# Altium PCB 气压.pcbdoc
Units mil, origin at the board's own origin, x right, y up, seen from the top; angles counter-clockwise.
Board outline 2895 x 2875 mil, 2 copper layers (Top Layer, Bottom Layer); 21 components, 13 nets, 110 pads, 14 vias.
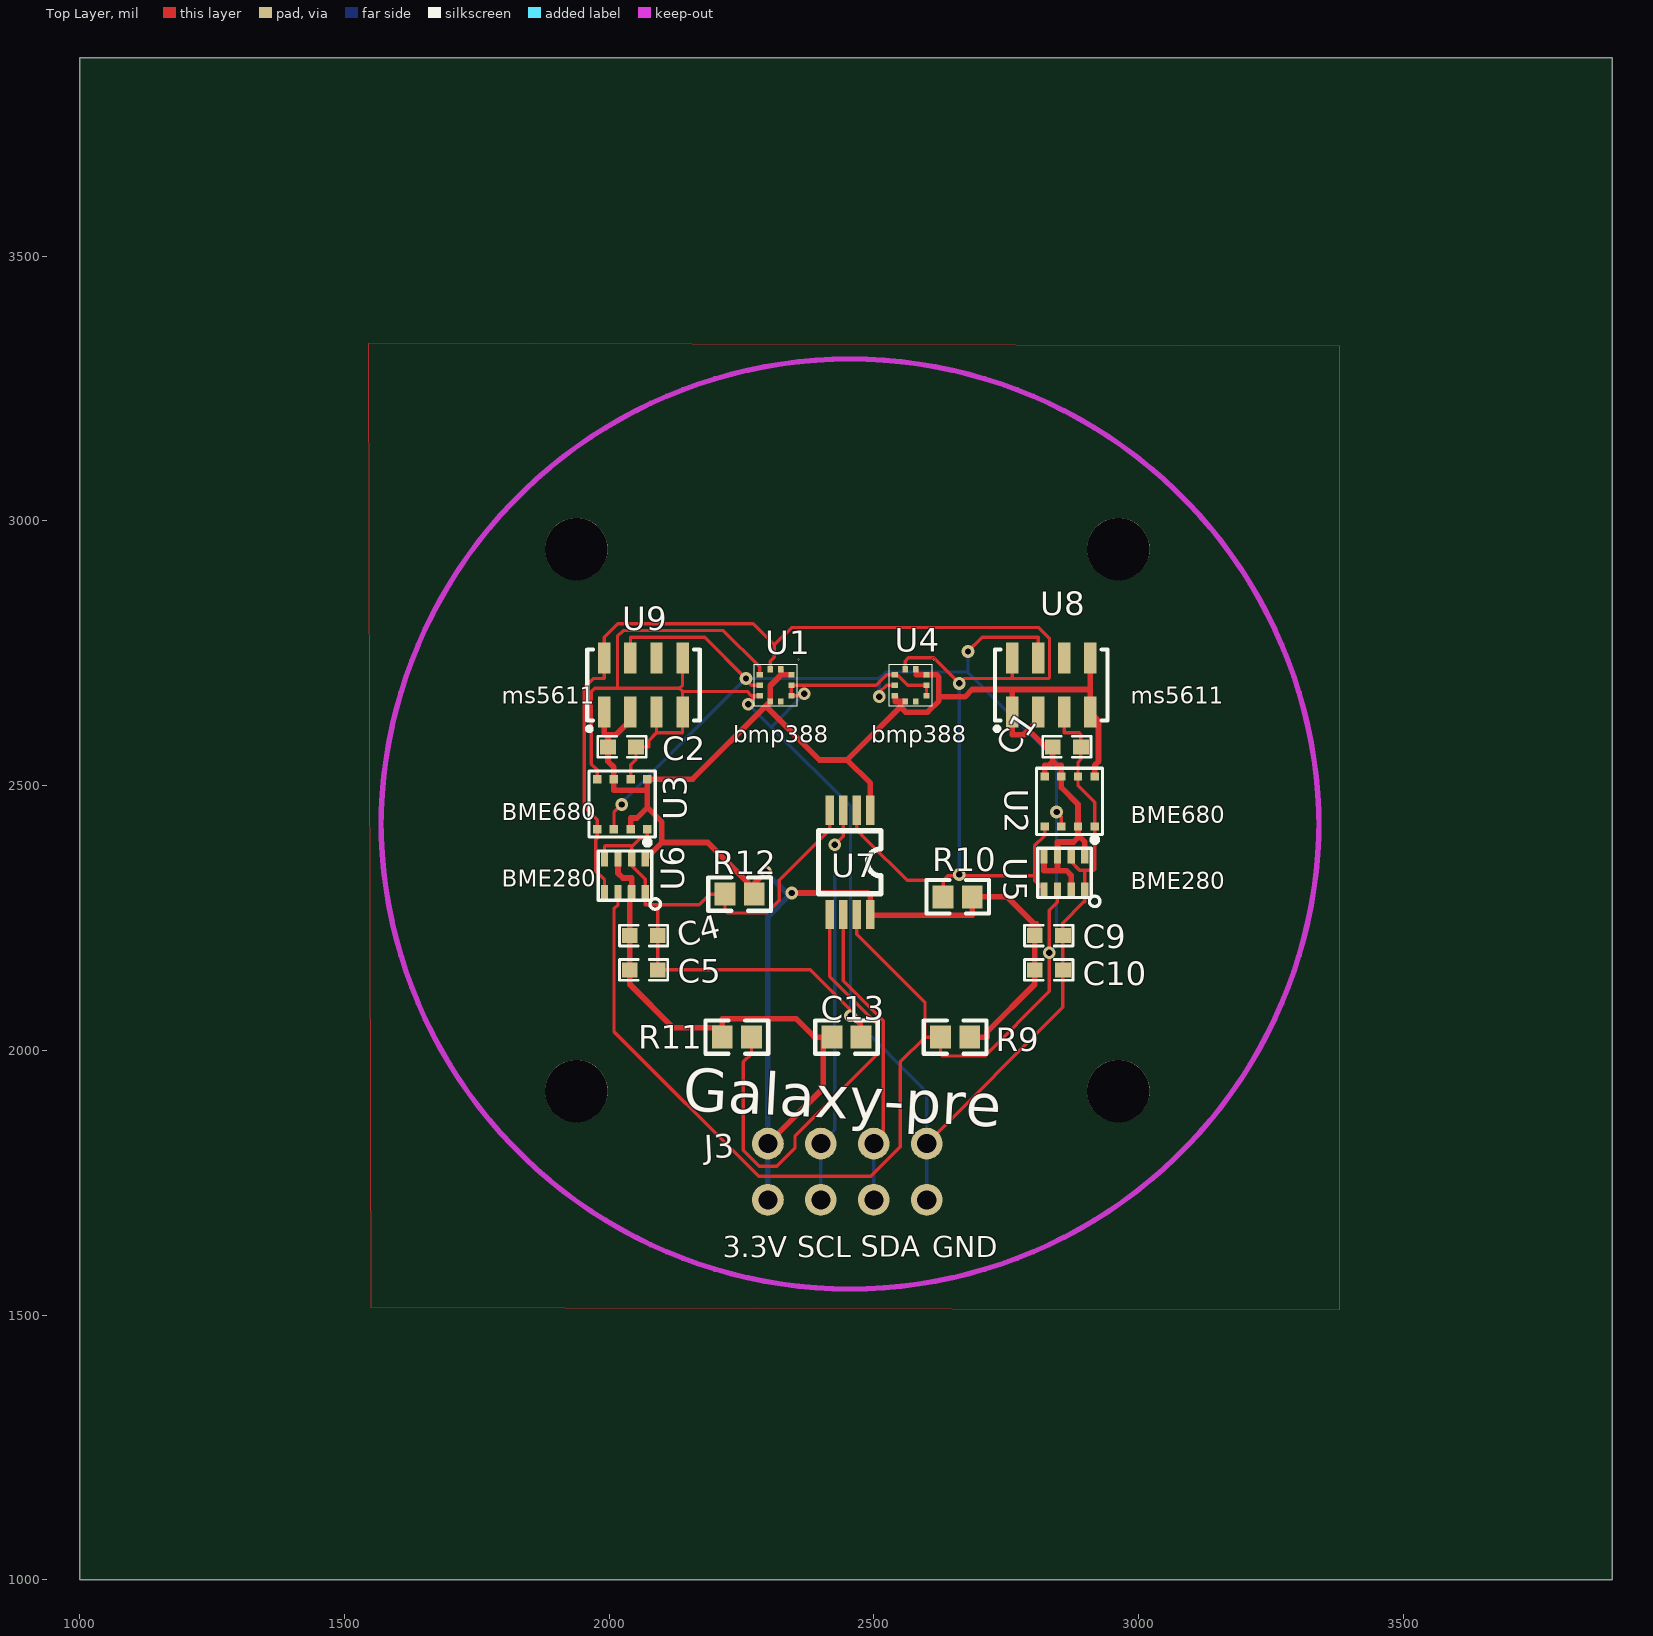
[diagram p0: Top Layer view]
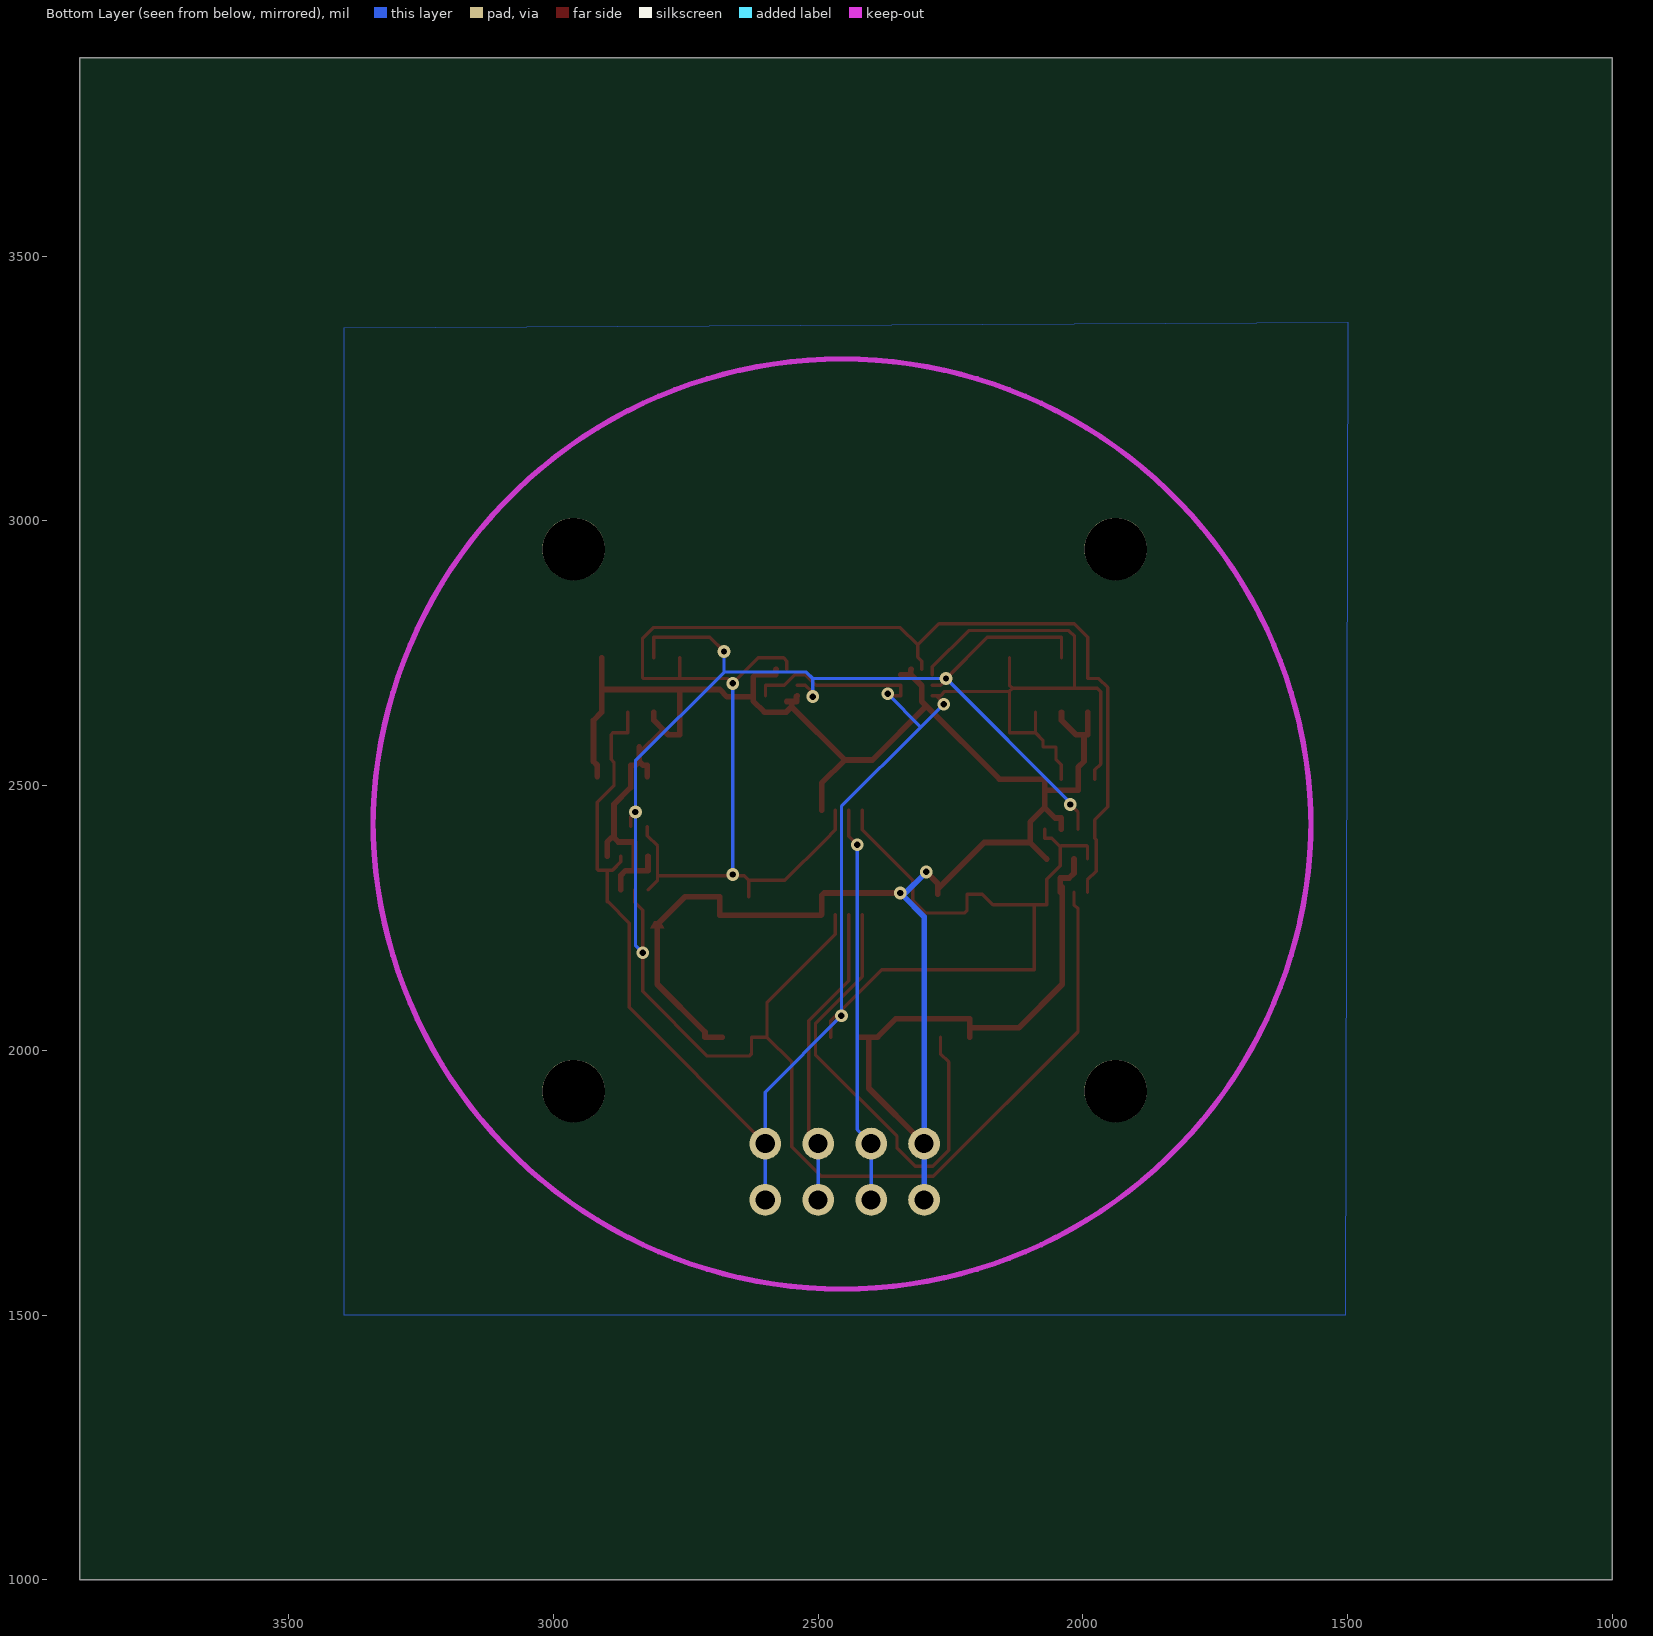
[diagram p1: Bottom Layer view, seen from below]

## Layer stack, top to bottom
Top Layer: signal copper (thickness not stored)
Dielectric: dielectric 12.6, FR-4, Dk 4.8
Bottom Layer: signal copper (thickness not stored)

## Board outline
3895,1000 1000,1000 1000,3875 3895,3875

## Components (designator, comment, footprint, x,y, rotation, side; value= is the part's Value field where it differs from the comment)
C1 "0.1uf" N0603 2885,2570 r0 top
C2 "0.1uf" N0603 2045,2570 r0 top
C4 "0.1uf" N0603 2045,2220 r180 top
C5 "0.1uf" N0603 2045,2155 r180 top
C9 "0.1uf" N0603 2810,2220 r180 top
C10 "0.1uf" N0603 2810,2155 r180 top
C13 "CAP-0603" 0603 2480,2025 r180 top
J3 "排针" PIN_4*2.54 2300,1840 r90 top
R9 "10K" 0603 2685,2025 r180 top
R10 "10K" 0603 2690,2290 r180 top
R11 "10K" 0603 2210,2025 r0 top
R12 "100K" 0603 2215,2295 r0 top
U1 "BMP388" NEWPCBLIB 2275,2650 r0 top
U2 "BME680" LGA-8-3X3MM 2870,2470 r270 top
U3 "BME680" LGA-8-3X3MM 2025,2465 r270 top
U4 "BMP388" NEWPCBLIB 2530,2650 r0 top
U5 "BME280/bmp280" LGA-8 2860,2335 r270 top
U6 "BME280" LGA-8 2030,2330 r270 top
U7 "LTC4307CMS8#PBF" MSOP-8 2455,2355 r270 top
U8 "MS5611-01BA03" QFN-8_5X3MM 2835,2690 r90 top
U9 "MS5611-01BA03" QFN-8_5X3MM 2065,2690 r90 top

## Footprints (in the part's own frame and the unit in brackets; to place one, negate y for a bottom-side part, rotate by r counter-clockwise, add the part's x,y. Pads: shape width x height; smd on the part's side, far side on the other; paste and mask are expansions set on the pad)
0603 [mil]
  rect 39.3x43.4 smd: 1(3.95,0) 2(59.05,0)
  silkscreen extent -28,-32 91,32
LGA-8 [mil]
  rect 27.6x13.8 smd: 1(31.5,38.6) 2(31.5,13) 3(31.5,-13) 4(31.5,-38.6) 5(-31.5,-38.6) 6(-31.5,-13) 7(-31.5,13) 8(-31.5,38.6)
  silkscreen extent -46,-50 63,67
LGA-8-3X3MM [mil]
  rect 15.8x15.8 smd: 1(47.2,47.2) 2(47.2,15.7) 3(47.2,-15.8) 4(47.2,-47.3) 5(-47.3,-47.3) 6(-47.3,-15.8) 7(-47.3,15.7) 8(-47.3,47.2)
  silkscreen extent -63,-63 77,62
MSOP-8 [mil]
  rect 55x16 smd: 1(-98.5,38.5) 2(-98.5,12.5) 3(-98.5,-12.5) 4(-98.5,-38.5) 5(98.5,-38.5) 6(98.5,-12.5) 7(98.5,12.5) 8(98.5,38.5)
  silkscreen extent -60,-60 60,59
N0603 [mil]
  rect 30x28 smd: 1(6,3) 2(-47,3)
  silkscreen extent -66,-16 25,23
NEWPCBLIB [mil]
  rect 10.8x11.8 smd: 1(49.2,69.9) 2(29.5,69.9) 6(29.5,8.9)
  rect 11.8x10.9 smd: 3(9.4,59.45) 4(9.4,39.75) 9(69.4,39.75) 10(69.4,59.45)
  rect 11.8x10.8 smd: 5(9.4,19.7) 8(69.4,19.7)
  rect 10.8x11.9 smd: 7(49.2,8.85)
  silkscreen extent 0,0 79,79
PIN_4*2.54 [mil]
  round 60 hole 36: 1(-16.02,0) 2(-16.02,-100) 3(-16.02,-200) 4(-16.02,-300)
QFN-8_5X3MM [mil]
  rect 59x23.6 smd: 1(-51.2,73.8) 2(-51.2,24.6) 3(-51.2,-24.6) 4(-51.2,-73.8) 5(51.2,-73.8) 6(51.2,-24.6) 7(51.2,24.6) 8(51.2,73.8)
  silkscreen extent -86,-106 67,106

## Free pads (board coordinates)
  round 60 hole 36: 1(2300,1717.6) 2(2400,1717.6) 3(2500,1717.6) 4(2600,1717.6)
  round 118.11 hole 118.11 unplated: ""(1938.19,1923.19) ""(1938.19,2946.81) ""(2961.81,1923.19) ""(2961.81,2946.81)

## Via types
v1: diameter 24.02, hole 12.2, Top Layer to Bottom Layer, 14 vias

## Nets (pads, with @x,y where several pads share a name; then routed paths per layer and width w, separated by ;. In a path a pad name is that pad's centre, name@x,y a point inside that pad or via, vN(x,y) a via of type N, cw(c..) or ccw(c..) an arc to the next point about the centre after c; other vN are vias at no path point)
3.3V: C1.2 C2.2 C4.1 C5.1 C9.1 C10.1 C13.2 J3.1 pad.1 R9.1 R10.1 R11.1 R12.2 U1.1 U1.6 U1.10 U2.2 U2.5 U2.6 U2.8 U3.2 U3.6 U3.8 U4.1 U4.5 U4.6 U4.10 U5.2 U5.5 U5.6 U5.8 U6.2 U6.6 U6.8 U7.1 U7.8 U8.1 U8.2 U8.4 U8.5 U9.1 U9.2 | length 5571.6
  Top Layer w10.63: U9.1 1991.2,2596.1 1998,2596.1 ; U6.6 2017,2334.5 2026,2325.5 2043,2325.5 U6.2@2043,2312 ; U9.2 2040.4,2623.4 2013.1,2596.1 1998,2596.1 ; U3.2 2040.7,2438.9 2052.5,2438.9 2072.3,2458.6 ; U6.2 U6.2@2043,2312 ; U6.8 2099.7,2392.6 ; R11.1 R11.1@2214,2042.4 ; R12.2@2274.1,2295 R12.2@2274.1,2297.2 ; v1(2295.8,2336.9) 2274.1,2315.2 R12.2@2274.1,2297.2 ; J3.1 2404.5,1928.5 C13.2@2404.5,2025 ; U1.1 2325.3,2718.8 2325.3,2709.4 ; U1.10 2325.3,2709.4 ; v1(2344.8,2297.2) 2488.9,2297.2 2493.5,2292.6 U7.8 2494.9,2255.1 2686.1,2255.1 2686.1,2290 2751.6,2290 2804,2237.6 C9.1 C10.1 2804,2138.4 2804,2124.8 2713.9,2034.7 2713.9,2025 R9.1@2681.1,2025 ; C13.2 C13.2@2404.5,2025 ; U7.1 2493.5,2494.2 2493.5,2504.6 2449.7,2548.4 ; U4.5 2540.9,2668.2 2540.9,2658.9 2550.2,2658.9 ; U4.6 2550.2,2658.9 ; U4.1 2580.3,2718.8 2580.3,2709.4 2589.9,2709.4 U4.10 2618.5,2709.4 2622.8,2705.1 2622.8,2667.7 ; U8.2 2810.4,2623.4 2792.2,2605.2 ; U5.5 2821.4,2339.5 2847,2339.5 ; U2.5 2822.7,2538.4 2830.6,2538.4 2838,2545.8 ; C1.2 C1.2@2838,2559.4 ; U5.2 2873,2312.4 2873,2330.5 2864,2339.5 2847,2339.5 ; U5.8 2898.6,2393.5 2890.4,2401.7 2885.7,2401.7 ; U8.5 2908.8,2681.5 ; U2.8 2917.2,2538.4 2924.3,2545.5 2924.3,2623.3 U8.4 2908.8,2681.5 ; 1998,2596.1 C2.2 1998,2545.8 2009.2,2534.6 U3.6 2009.2,2501.7 2009.2,2491.2 2072.2,2491.2 ; U6.2@2043,2312 2039,2308 C4.1 C5.1 2039,2124.8 2121.3,2042.4 R11.1@2214,2042.4 ; 2072.2,2491.2 2072.3,2491.1 2072.3,2458.6 ; 2072.2,2491.2 U3.8 2157.9,2512.3 2295.9,2650.3 ; 2072.3,2458.6 2099.7,2431.2 2099.7,2392.6 ; 2099.7,2392.6 2186.5,2392.6 2274.1,2305 R12.2@2274.1,2297.2 ; R11.1@2214,2042.4 2214,2059.9 2353.2,2059.9 2388.1,2025 C13.2@2404.5,2025 ; 2295.9,2650.3 2397.7,2548.4 2449.7,2548.4 ; 2295.9,2650.3 U1.6 2304.5,2688.7 2325.3,2709.4 ; 2449.7,2548.4 2550.2,2649 ; 2550.2,2649 2560.4,2638.8 2601.5,2638.8 2622.8,2660.1 2622.8,2667.7 ; 2550.2,2649 2550.2,2658.9 ; 2622.8,2667.7 2671.9,2667.7 2685.7,2681.5 2761.2,2681.5 ; 2761.2,2681.5 2908.8,2681.5 ; 2761.2,2681.5 U8.1 2761.2,2596.1 2783.1,2596.1 2792.2,2605.2 ; 2792.2,2605.2 C1.2@2838,2559.4 ; 2838,2545.8 2845.4,2538.4 2854.2,2538.4 U2.6 2854.2,2496.2 2885.7,2464.7 U2.2 2885.7,2401.7 ; 2838,2545.8 C1.2@2838,2559.4 ; 2847,2339.5 2847,2344.1 2847,2357.6 U5.6 2847,2393.5 2877.5,2393.5 2885.7,2401.7
  Bottom Layer w10.63: v1(2295.8,2336.9) v1@2340.2,2292.5 ; pad.1 J3.1 2300,2252.4 v1@2340.2,2292.5 ; v1(2344.8,2297.2) v1@2340.2,2292.5
GND: C1.1 C2.1 C4.2 C5.2 C9.2 C10.2 C13.1 J3.4 pad.4 R12.1 U1.3 U1.5 U1.8 U1.9 U2.1 U2.7 U3.1 U3.5 U3.7 U4.3 U4.8 U4.9 U5.1 U5.7 U6.1 U6.5 U6.7 U7.4 U8.3 U9.3 U9.4 U9.5 | length 5196.8
  Top Layer w6.3: U3.5 1977.7,2529.7 1966.6,2540.8 1966.6,2677.6 1972.7,2683.6 2015.8,2683.6 ; U6.5 1991.4,2384.8 1992.9,2386.4 2041.5,2386.4 2043,2384.8 ; U3.7 2040.7,2539.2 2051,2549.5 C2.1 2075.5,2573 2075.5,2585.7 2089.6,2599.8 ; U3.1 2072.2,2400.4 2058.5,2400.4 2043,2384.8 ; U9.3 2089.6,2602.2 2089.6,2599.8 ; U9.5 2138.8,2689.4 2133,2683.6 ; v1(2262.9,2653.8) 2262.9,2655.9 2276.7,2669.7 ; U1.5 2276.7,2669.7 ; U1.3 2284.4,2724.4 2215.9,2792.9 2026.6,2792.9 2015.8,2782.1 2015.8,2683.6 ; v1(2368.8,2673.4) 2363.5,2673.4 2359.8,2669.7 U1.8 2344.4,2689.7 2504.3,2689.7 2524,2709.4 U4.3 2544.5,2709.4 2564.2,2689.7 2599.4,2689.7 U4.8 ; U7.4 2416.5,2416.5 2321.7,2321.7 2321.7,2283.5 2297.7,2259.5 2223.3,2259.5 2219,2263.8 R12.1 2189.8,2295 2169.9,2275.2 2092,2275.2 ; v1(2456.1,2065.1) C13.1@2476.1,2045.1 ; C13.1@2476.1,2025 C13.1@2476.1,2045.1 ; J3.4 2857,2081 C10.2 C9.2 2857,2240.5 2896.6,2280.2 2898.6,2280.2 U5.1 2898.6,2326.8 2898.6,2340.2 ; U8.3 2859.6,2599.8 2887.8,2599.8 2891,2596.5 C1.1 2891,2549.5 2885.7,2544.2 U2.7 2885.7,2499.9 2917.2,2468.4 U2.1 2917.2,2342.1 2915.4,2340.2 2898.6,2340.2 ; U5.7 2873,2355.8 2888.5,2340.2 2898.6,2340.2 ; 2015.8,2683.6 2133,2683.6 ; 2043,2384.8 2043,2373.2 U6.7 2043,2348.7 2068.6,2323.1 U6.1 2068.6,2286.8 2068.6,2275.2 2092,2275.2 ; 2089.6,2599.8 2138.8,2599.8 2138.8,2619.3 U9.4 2138.8,2677.8 ; 2092,2275.2 C4.2 C5.2 2380.3,2152 2476.1,2056.2 C13.1@2476.1,2045.1 ; 2133,2683.6 2138.8,2677.8 ; 2138.8,2677.8 2260.8,2677.8 2269,2669.7 2276.7,2669.7
  Bottom Layer w6.3: v1(2262.9,2653.8) 2306,2610.6 ; v1(2368.8,2673.4) 2306,2610.6 ; pad.4 J3.4 2600,1921.1 v1(2456.1,2065.1) 2456.1,2460.6 2306,2610.6
S$67: 
S$69: 
SCL0: J3.2 pad.2 U7.3 | length 753.5
  Top Layer w6.3: v1(2426.5,2388.3) 2442.5,2404.3 U7.3
  Bottom Layer w6.3: pad.2 J3.2 2426.5,1850.5 v1(2426.5,2388.3)
SCL1: R10.2 U1.2 U2.4 U3.4 U4.2 U5.4 U6.4 U7.2 U8.8 U9.8 | length 2840
  Top Layer w6.3: U6.4 1991.4,2321.8 1975,2338.3 1975,2397.6 1977.7,2400.4 1977.7,2409.1 U3.4 1977.7,2435.2 1953.1,2459.8 1953.1,2685.4 1969.9,2702.2 1991.2,2702.2 U9.8 1991.2,2780.2 2016.6,2805.7 2272,2805.7 2311.9,2765.7 ; U1.2 2304.5,2735.3 2311.9,2742.8 2311.9,2765.7 ; U7.2 2467.5,2416.5 2486.9,2397.1 2487,2397.1 2562.9,2321.2 2631,2321.2 ; U4.2 2559.5,2735.3 2565.4,2741.2 2613.2,2741.2 v1(2661.4,2693) 2670.6,2702.2 2761.2,2702.2 ; R10.2 2631,2321.2 ; v1(2661.4,2332.1) v1@2661.4,2329.5 ; U8.8 2761.2,2702.2 ; U5.4 2803.4,2321.5 2803.4,2329.5 ; U2.4 2822.7,2414.1 2822.7,2405.4 2803.4,2386.1 2803.4,2329.5 ; 2311.9,2765.7 2344.8,2798.6 2811.8,2798.6 2831.8,2778.6 2831.8,2704 2829.9,2702.2 2761.2,2702.2 ; 2631,2321.2 2639.3,2329.5 v1@2661.4,2329.5 ; v1@2661.4,2329.5 2803.4,2329.5
  Bottom Layer w6.3: v1(2661.4,2332.1) v1(2661.4,2693)
SDA0: J3.3 pad.3 U7.6 | length 577.7
  Top Layer w6.3: U7.6 2442.5,2131.7 2518,2056.3 2518,1841.9 J3.3
  Bottom Layer w6.3: pad.3 J3.3
SDA1: R9.2 U1.4 U2.3 U3.3 U4.4 U5.3 U6.3 U7.7 U8.7 U9.7 | length 4039.8
  Top Layer w6.3: U3.3 2009.2,2449.3 v1(2024.2,2464.3) ; U6.3 2017,2275.2 2009.3,2267.4 2009.3,2035.6 2282.8,1762 2494.3,1762 2550,1817.7 2550,1978.2 2596.8,2025 ; U9.7 2040.4,2780.2 2180.6,2780.2 v1(2258.6,2702.3) 2258.6,2700.1 2269,2689.7 U1.4@2284.4,2689.7 ; U7.7 2467.5,2219.5 2596.8,2090.2 2596.8,2025 ; v1(2510.4,2668.2) 2510.4,2676.2 2524,2689.7 U4.4@2539.4,2689.7 ; v1(2677.9,2753.3) 2704.9,2780.2 2810.4,2780.2 U8.7 ; v1(2845.1,2450.2) 2854.2,2441.1 U2.3 ; U5.3 2847,2280.2 2831.6,2264.7 v1(2831.6,2184.5) 2831.6,2111.5 2709.4,1989.3 2630.4,1989.3 2626,1993.8 R9.2 2596.8,2025
  Bottom Layer w6.3: v1(2024.2,2464.3) 2024.2,2467.9 v1(2258.6,2702.3) 2510.4,2702.3 ; v1(2510.4,2668.2) 2510.4,2702.3 ; v1(2677.9,2753.3) 2677.9,2714.5 ; v1(2831.6,2184.5) 2845.1,2198.1 v1(2845.1,2450.2) 2845.1,2547.3 2677.9,2714.5 ; 2510.4,2702.3 2522.6,2714.5 2677.9,2714.5
U1_7: U1.7
U4_7: U4.7
U7_5: R11.2 U7.5 | length 887
  Top Layer w6.3: R11.2@2269.1,2025 2269.1,1993.8 2253.4,1978.1 2253.4,1811 2283.5,1780.8 2317.1,1780.8 2351.1,1814.8 2351.1,1837.3 2505.2,1991.5 2505.2,2050.6 2416.5,2139.4 U7.5
U8_6: U8.6
U9_6: U9.6

## Polygon pours and split planes (outlines as drawn)
GND on Bottom Layer (solid): 1500,3370 1505,1500 3395,1500 3395,3365 1500,3375
GND on Top Layer (solid): 1545,3330 1550,1515 3380,1510 3380,3330 1545,3335

## Keep-outs
Keep-Out Layer:
  lines w10: 1569.17,2420 cw(c2455,2420) 3340.82,2420 ; 1569.17,2435 ccw(c2455,2435) 3340.82,2435

## Other copper
Top Layer:
  region net 3.3V: 2790.71,2231 2817.29,2231 2809.31,2244.2 2798.68,2244.2

## Silkscreen, mask and mechanical layers (free items; w line width, h text height)
Top Overlay:
  text "ms5611" at 1797.5,2654.25 h31.5
  text "ms5611" at 2985,2654.25 h31.5
  text "bmp388" at 2235,2580.65 h31.5
  text "bmp388" at 2495,2580.65 h31.5
  text "BME680" at 1797.5,2434.25 h31.5
  text "BME680" at 2985,2429.25 h31.5
  text "BME280" at 1797.5,2309.25 h31.5
  text "BME280" at 2985,2304.25 h31.5
  text "Galaxy-pre" at 2137.91,1886.45 h80 r357
  text "SDA" at 2475,1610.32 h39.37
  text "3.3V" at 2215,1608.83 h39.37
  text "SCL" at 2355,1608.82 h39.37
  text "GND" at 2610,1608.82 h39.37
Document:
  lines w0.1: 2446.5,2436.5 2448.5,2438.5

## Text inside footprints (layer, text, board x,y; h text height)
U1: Top Overlay "O" at 2359.97,2739.97 h0.79 r180
U4: Top Overlay "O" at 2614.97,2739.86 h1.97 r180